# EAGLE board KoncovaCast_multi (EAGLE 6.4)
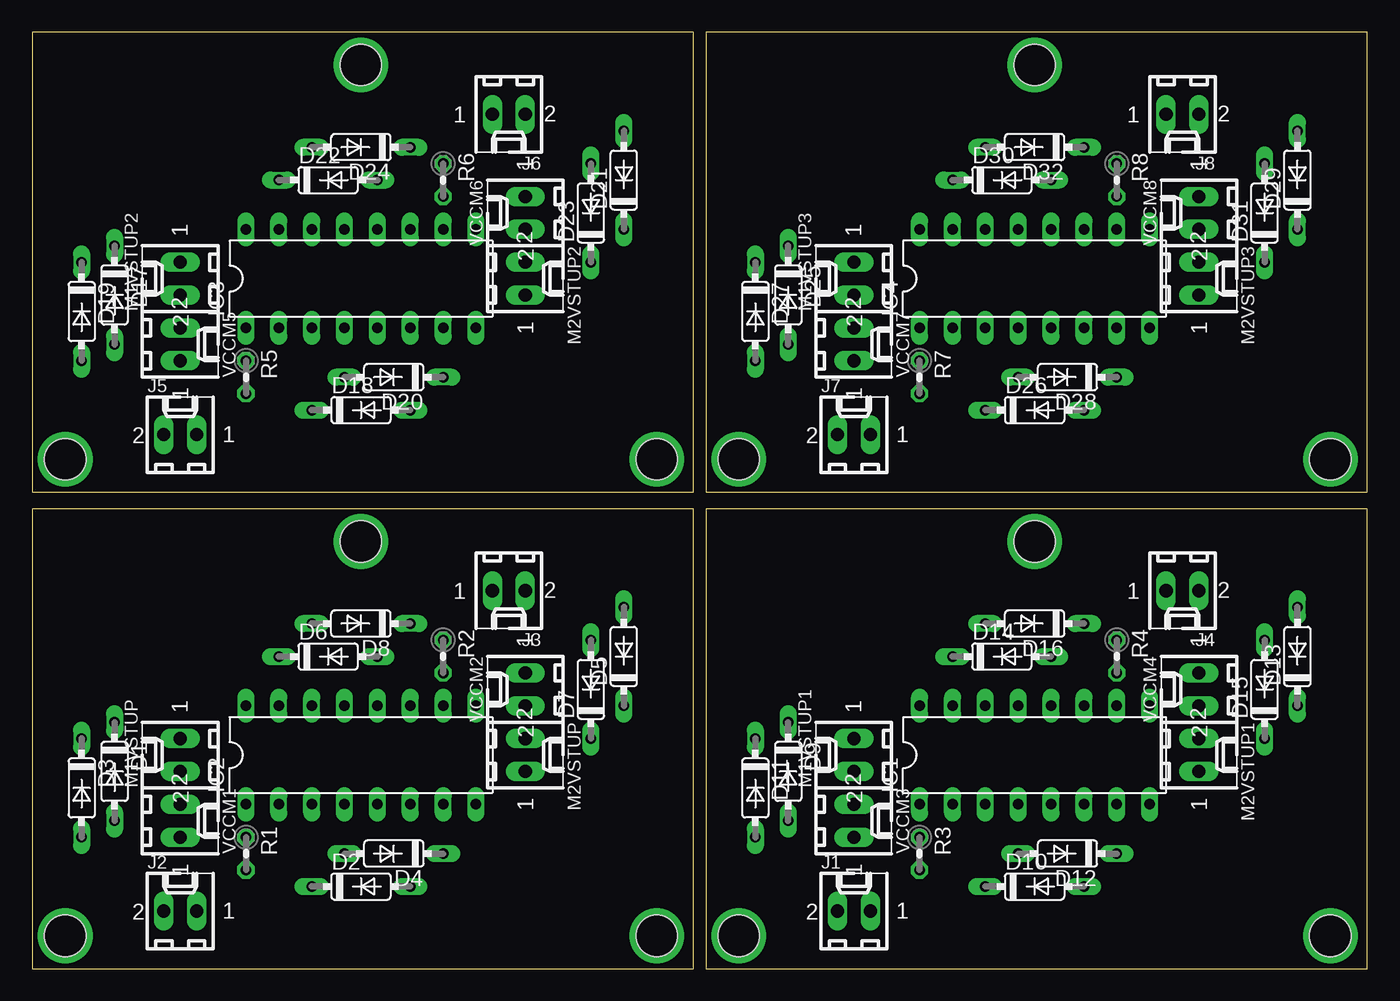
[diagram p0: board, top side]
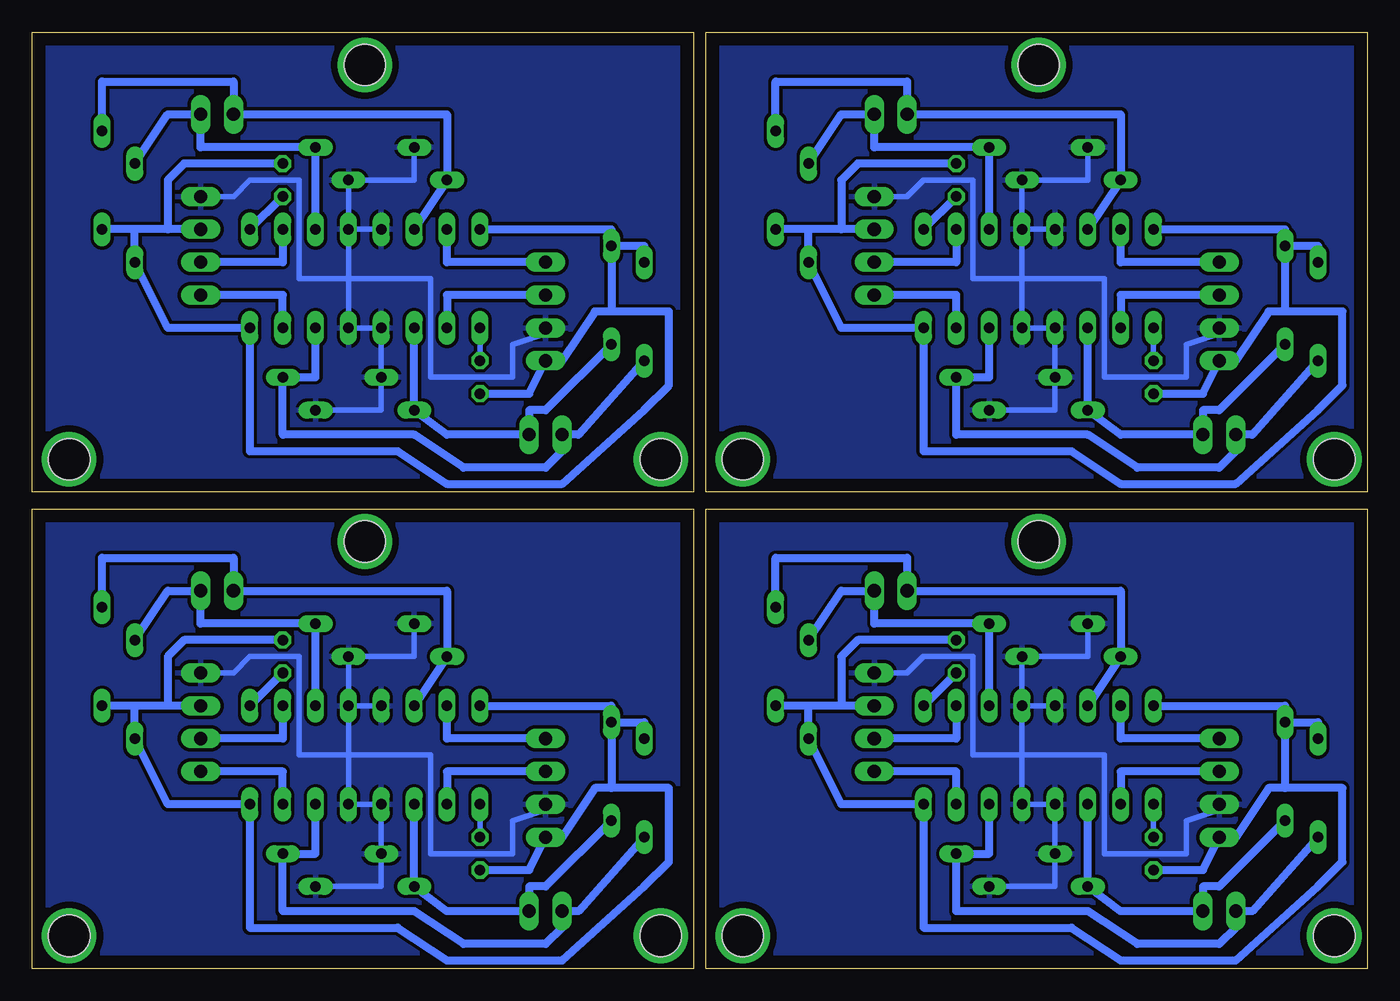
[diagram p1: board, bottom side, seen from below]

Size 103.17 x 72.38 mm. Coordinates in mm from the lower left corner, seen from the top.
Outline: 0,0 51.1,0 51.1,35.55 0,35.55 0,0
Outline: 52.07,0 103.17,0 103.17,35.55 52.07,35.55 52.07,0
Outline: 0,36.83 51.1,36.83 51.1,72.38 0,72.38 0,36.83
Outline: 52.07,36.83 103.17,36.83 103.17,72.38 52.07,72.38 52.07,36.83
Copper layers (1*16): Top 0.035mm / dielectric 1.5mm / Bottom 0.035mm
Design rules "default": minimum track width 10mil, minimum drill 24mil, track to track 8mil, track to pad 8mil, pad to pad 8mil, via to via 8mil, smd to smd 8mil, copper to edge 40mil, drill to drill 8mil, minimum pad ring 10mil, minimum via ring 8mil, stop-mask expansion 4mil, vias tented up to drill 0mil, thermal gap 10mil
Holes 3.2 mm at 2.54,2.54 48.26,2.54 25.4,33.02 54.61,2.54 100.33,2.54 77.47,33.02 2.54,39.37 48.26,39.37 25.4,69.85 54.61,39.37 100.33,39.37 77.47,69.85

## Footprints (pad centres in the part's own frame; a part is rotated, then mirrored left to right if it is on the bottom)
DO35-7 = drill 0.813 long: A 3.81,0; C -3.81,0
DIL16 = drill 0.813 long: 1 -8.89,-3.81; 2 -6.35,-3.81; 3 -3.81,-3.81; 4 -1.27,-3.81; 5 1.27,-3.81; 6 3.81,-3.81; 7 6.35,-3.81; 8 8.89,-3.81; 9 8.89,3.81; 10 6.35,3.81; 11 3.81,3.81; 12 1.27,3.81; 13 -1.27,3.81; 14 -3.81,3.81; 15 -6.35,3.81; 16 -8.89,3.81
6410-02 = drill 1.016 long: 1 1.27,0; 2 -1.27,0
0204V = drill 0.813 octagon: 1 -1.27,0; 2 1.27,0

## Placement (x,y rotation side)
D1  1N4148DO35-7  [DO35-7]  6.35,15.24 270 top
D2  1N4148DO35-7  [DO35-7]  25.4,6.35 0 top
D3  1N4148DO35-7  [DO35-7]  3.81,13.97 270 top
D4  1N4148DO35-7  [DO35-7]  27.94,8.89 180 top
D5  1N4148DO35-7  [DO35-7]  45.72,24.13 90 top
D6  1N4148DO35-7  [DO35-7]  22.86,24.13 0 top
D7  1N4148DO35-7  [DO35-7]  43.18,21.59 90 top
D8  1N4148DO35-7  [DO35-7]  25.4,26.67 180 top
D9  1N4148DO35-7  [DO35-7]  58.42,15.24 270 top
D10  1N4148DO35-7  [DO35-7]  77.47,6.35 0 top
D11  1N4148DO35-7  [DO35-7]  55.88,13.97 270 top
D12  1N4148DO35-7  [DO35-7]  80.01,8.89 180 top
D13  1N4148DO35-7  [DO35-7]  97.79,24.13 90 top
D14  1N4148DO35-7  [DO35-7]  74.93,24.13 0 top
D15  1N4148DO35-7  [DO35-7]  95.25,21.59 90 top
D16  1N4148DO35-7  [DO35-7]  77.47,26.67 180 top
D17  1N4148DO35-7  [DO35-7]  6.35,52.07 270 top
D18  1N4148DO35-7  [DO35-7]  25.4,43.18 0 top
D19  1N4148DO35-7  [DO35-7]  3.81,50.8 270 top
D20  1N4148DO35-7  [DO35-7]  27.94,45.72 180 top
D21  1N4148DO35-7  [DO35-7]  45.72,60.96 90 top
D22  1N4148DO35-7  [DO35-7]  22.86,60.96 0 top
D23  1N4148DO35-7  [DO35-7]  43.18,58.42 90 top
D24  1N4148DO35-7  [DO35-7]  25.4,63.5 180 top
D25  1N4148DO35-7  [DO35-7]  58.42,52.07 270 top
D26  1N4148DO35-7  [DO35-7]  77.47,43.18 0 top
D27  1N4148DO35-7  [DO35-7]  55.88,50.8 270 top
D28  1N4148DO35-7  [DO35-7]  80.01,45.72 180 top
D29  1N4148DO35-7  [DO35-7]  97.79,60.96 90 top
D30  1N4148DO35-7  [DO35-7]  74.93,60.96 0 top
D31  1N4148DO35-7  [DO35-7]  95.25,58.42 90 top
D32  1N4148DO35-7  [DO35-7]  77.47,63.5 180 top
IC1  L293D  [DIL16]  77.47,16.51 0 top
IC2  L293D  [DIL16]  25.4,16.51 0 top
IC3  L293D  [DIL16]  25.4,53.34 0 top
IC4  L293D  [DIL16]  77.47,53.34 0 top
J1  22-27-2021-02  [6410-02]  63.5,4.45 0 top
J2  22-27-2021-02  [6410-02]  11.43,4.45 0 top
J3  22-27-2021-02  [6410-02]  36.83,29.21 180 top
J4  22-27-2021-02  [6410-02]  88.9,29.21 180 top
J5  22-27-2021-02  [6410-02]  11.43,41.27 0 top
J6  22-27-2021-02  [6410-02]  36.83,66.04 180 top
J7  22-27-2021-02  [6410-02]  63.5,41.27 0 top
J8  22-27-2021-02  [6410-02]  88.9,66.04 180 top
M1VSTUP  22-27-2021-02  [6410-02]  11.43,16.51 90 top
M1VSTUP1  22-27-2021-02  [6410-02]  63.5,16.51 90 top
M1VSTUP2  22-27-2021-02  [6410-02]  11.43,53.34 90 top
M1VSTUP3  22-27-2021-02  [6410-02]  63.5,53.34 90 top
M2VSTUP  22-27-2021-02  [6410-02]  38.1,16.51 270 top
M2VSTUP1  22-27-2021-02  [6410-02]  90.17,16.51 270 top
M2VSTUP2  22-27-2021-02  [6410-02]  38.1,53.34 270 top
M2VSTUP3  22-27-2021-02  [6410-02]  90.17,53.34 270 top
R1  10k  [0204V]  16.51,8.89 270 top
R2  10k  [0204V]  31.75,24.13 270 top
R3  10k  [0204V]  68.58,8.89 270 top
R4  10k  [0204V]  83.82,24.13 270 top
R5  10k  [0204V]  16.51,45.72 270 top
R6  10k  [0204V]  31.75,60.96 270 top
R7  10k  [0204V]  68.58,45.72 270 top
R8  10k  [0204V]  83.82,60.96 270 top
VCCM1  22-27-2021-02  [6410-02]  11.43,11.43 270 top
VCCM2  22-27-2021-02  [6410-02]  38.1,21.59 90 top
VCCM3  22-27-2021-02  [6410-02]  63.5,11.43 270 top
VCCM4  22-27-2021-02  [6410-02]  90.17,21.59 90 top
VCCM5  22-27-2021-02  [6410-02]  11.43,48.26 270 top
VCCM6  22-27-2021-02  [6410-02]  38.1,58.42 90 top
VCCM7  22-27-2021-02  [6410-02]  63.5,48.26 270 top
VCCM8  22-27-2021-02  [6410-02]  90.17,58.42 90 top

## Library data of the parts
D1-D32 = diode
IC1-IC4 = st-microelectronics; MPN: L293D; OC_FARNELL: 9589619; OC_NEWARK: 56P8249
J1-J8 M1VSTUP M1VSTUP1-M1VSTUP3 M2VSTUP M2VSTUP1-M2VSTUP3 VCCM1-VCCM8 = con-molex; OC_FARNELL: unknown; OC_NEWARK: unknown
R1-R8 = resistor

## Nets
1A: IC2.2 M1VSTUP.2
1A1: IC1.2 M1VSTUP1.2
1A2: IC3.2 M1VSTUP2.2
1A3: IC4.2 M1VSTUP3.2
2A: IC2.7 M2VSTUP.1
2A1: IC1.7 M2VSTUP1.1
2A2: IC3.7 M2VSTUP2.1
2A3: IC4.7 M2VSTUP3.1
3A: IC2.10 M2VSTUP.2
3A1: IC1.10 M2VSTUP1.2
3A2: IC3.10 M2VSTUP2.2
3A3: IC4.10 M2VSTUP3.2
4A: IC2.15 M1VSTUP.1
4A1: IC1.15 M1VSTUP1.1
4A2: IC3.15 M1VSTUP2.1
4A3: IC4.15 M1VSTUP3.1
GND: D2.A D4.A D6.A D8.A IC2.4 IC2.5 IC2.12 IC2.13 VCCM1.2 VCCM2.1
GND1: D10.A D12.A D14.A D16.A IC1.4 IC1.5 IC1.12 IC1.13 VCCM3.2 VCCM4.1
GND2: D18.A D20.A D22.A D24.A IC3.4 IC3.5 IC3.12 IC3.13 VCCM5.2 VCCM6.1
GND3: D26.A D28.A D30.A D32.A IC4.4 IC4.5 IC4.12 IC4.13 VCCM7.2 VCCM8.1
M1: D9.A D10.C IC1.3 J1.1
M2: D11.A D12.C IC1.6 J1.2
M3: D15.A D16.C IC1.11 J4.2
M4: D13.A D14.C IC1.14 J4.1
M5: D17.A D18.C IC3.3 J5.1
M6: D19.A D20.C IC3.6 J5.2
M7: D23.A D24.C IC3.11 J6.2
M8: D21.A D22.C IC3.14 J6.1
M9: D25.A D26.C IC4.3 J7.1
M10: D27.A D28.C IC4.6 J7.2
M11: D1.A D2.C IC2.3 J2.1
M12: D3.A D4.C IC2.6 J2.2
M13: D31.A D32.C IC4.11 J8.2
M14: D29.A D30.C IC4.14 J8.1
M21: D5.A D6.C IC2.14 J3.1
M22: D7.A D8.C IC2.11 J3.2
N$1: IC2.1 R1.1
N$2: IC2.9 R2.2
N$6: IC1.1 R3.1
N$7: IC1.9 R4.2
N$11: IC3.1 R5.1
N$12: IC3.9 R6.2
N$16: IC4.1 R7.1
N$17: IC4.9 R8.2
VCC_M: D1.C D3.C D5.C D7.C IC2.8 IC2.16 R1.2 R2.1 VCCM1.1 VCCM2.2
VCC_M1: D9.C D11.C D13.C D15.C IC1.8 IC1.16 R3.2 R4.1 VCCM3.1 VCCM4.2
VCC_M2: D17.C D19.C D21.C D23.C IC3.8 IC3.16 R5.2 R6.1 VCCM5.1 VCCM6.2
VCC_M3: D25.C D27.C D29.C D31.C IC4.8 IC4.16 R7.2 R8.1 VCCM7.1 VCCM8.2

## Tracks (layer width: path | path; a pad name or v marks a point on that pad's centre or on a via)
1A
  Bottom 0.61: M1VSTUP.2 19.05,15.24 IC2.2
1A1
  Bottom 0.61: M1VSTUP1.2 71.12,15.24 IC1.2
1A2
  Bottom 0.61: M1VSTUP2.2 19.05,52.07 IC3.2
1A3
  Bottom 0.61: M1VSTUP3.2 71.12,52.07 IC4.2
2A
  Bottom 0.61: IC2.7 31.75,15.24 M2VSTUP.1
2A1
  Bottom 0.61: IC1.7 83.82,15.24 M2VSTUP1.1
2A2
  Bottom 0.61: IC3.7 31.75,52.07 M2VSTUP2.1
2A3
  Bottom 0.61: IC4.7 83.82,52.07 M2VSTUP3.1
3A
  Bottom 0.61: IC2.10 31.75,17.78 M2VSTUP.2
3A1
  Bottom 0.61: IC1.10 83.82,17.78 M2VSTUP1.2
3A2
  Bottom 0.61: IC3.10 31.75,54.61 M2VSTUP2.2
3A3
  Bottom 0.61: IC4.10 83.82,54.61 M2VSTUP3.2
4A
  Bottom 0.61: M1VSTUP.1 19.05,17.78 IC2.15
4A1
  Bottom 0.61: M1VSTUP1.1 71.12,17.78 IC1.15
4A2
  Bottom 0.61: M1VSTUP2.1 19.05,54.61 IC3.15
4A3
  Bottom 0.61: M1VSTUP3.1 71.12,54.61 IC4.15
GND
  Bottom 0.406: D2.A 24.13,6.35 D4.A IC2.4 IC2.5 26.67,16.51 | IC2.13 IC2.12 | 26.67,16.51 IC2.12 | IC2.12 D6.A 21.59,24.13 D8.A | VCCM2.1 35.56,22.86 34.29,24.13 30.48,24.13 30.48,16.51 26.67,16.51 | VCCM1.2 10.16,12.7 13.97,11.43 13.97,8.89 20.32,8.89 20.32,16.51 26.67,16.51
  pour Bottom (isolate 0.254): 0,35.56 50.8,35.56 50.8,0 0,0
GND1
  Bottom 0.406: D10.A 76.2,6.35 D12.A IC1.4 IC1.5 78.74,16.51 | IC1.13 IC1.12 | 78.74,16.51 IC1.12 | IC1.12 D14.A 73.66,24.13 D16.A | VCCM4.1 87.63,22.86 86.36,24.13 82.55,24.13 82.55,16.51 78.74,16.51 | VCCM3.2 62.23,12.7 66.04,11.43 66.04,8.89 72.39,8.89 72.39,16.51 78.74,16.51
  pour Bottom (isolate 0.254): 52.07,35.56 102.87,35.56 102.87,0 52.07,0
GND2
  Bottom 0.406: D18.A 24.13,43.18 D20.A IC3.4 IC3.5 26.67,53.34 | IC3.13 IC3.12 | 26.67,53.34 IC3.12 | IC3.12 D22.A 21.59,60.96 D24.A | VCCM6.1 35.56,59.69 34.29,60.96 30.48,60.96 30.48,53.34 26.67,53.34 | VCCM5.2 10.16,49.53 13.97,48.26 13.97,45.72 20.32,45.72 20.32,53.34 26.67,53.34
  pour Bottom (isolate 0.254): 0,72.39 50.8,72.39 50.8,36.83 0,36.83
GND3
  Bottom 0.406: D26.A 76.2,43.18 D28.A IC4.4 IC4.5 78.74,53.34 | IC4.13 IC4.12 | 78.74,53.34 IC4.12 | IC4.12 D30.A 73.66,60.96 D32.A | VCCM8.1 87.63,59.69 86.36,60.96 82.55,60.96 82.55,53.34 78.74,53.34 | VCCM7.2 62.23,49.53 66.04,48.26 66.04,45.72 72.39,45.72 72.39,53.34 78.74,53.34
  pour Bottom (isolate 0.254): 52.07,72.39 102.87,72.39 102.87,36.83 52.07,36.83
M1
  Bottom 0.61: D9.A 63.5,6.35 64.77,6.35 J1.1 71.12,4.45 D10.C IC1.3
M2
  Bottom 0.406: J1.2 62.23,3.17
  Bottom 0.61: IC1.6 81.28,8.89 D12.C 83.82,4.45 73.66,4.45 69.85,1.91 63.5,1.91 62.23,3.17 | D11.A 60.96,4.45 J1.2
M3
  Bottom 0.61: D15.A 92.71,29.21 J4.2 90.17,26.67 D16.C IC1.11
M4
  Bottom 0.61: IC1.14 D14.C 71.12,29.21 J4.1 87.63,31.75 97.79,31.75 D13.A
M5
  Bottom 0.61: D17.A 11.43,43.18 12.7,43.18 J5.1 19.05,41.27 D18.C IC3.3
M6
  Bottom 0.406: J5.2 10.16,40.01
  Bottom 0.61: IC3.6 29.21,45.72 D20.C 31.75,41.27 21.59,41.27 17.78,38.73 11.43,38.73 10.16,40.01 | D19.A 8.89,41.27 J5.2
M7
  Bottom 0.61: D23.A 40.64,66.04 J6.2 38.1,63.5 D24.C IC3.11
M8
  Bottom 0.61: IC3.14 D22.C 19.05,66.04 J6.1 35.56,68.58 45.72,68.58 D21.A
M9
  Bottom 0.61: D25.A 63.5,43.18 64.77,43.18 J7.1 71.12,41.27 D26.C IC4.3
M10
  Bottom 0.406: J7.2 62.23,40.01
  Bottom 0.61: IC4.6 81.28,45.72 D28.C 83.82,41.27 73.66,41.27 69.85,38.73 63.5,38.73 62.23,40.01 | D27.A 60.96,41.27 J7.2
M11
  Bottom 0.61: D1.A 11.43,6.35 12.7,6.35 J2.1 19.05,4.45 D2.C IC2.3
M12
  Bottom 0.406: J2.2 10.16,3.17
  Bottom 0.61: IC2.6 29.21,8.89 D4.C 31.75,4.45 21.59,4.45 17.78,1.91 11.43,1.91 10.16,3.17 | D3.A 8.89,4.45 J2.2
M13
  Bottom 0.61: D31.A 92.71,66.04 J8.2 90.17,63.5 D32.C IC4.11
M14
  Bottom 0.61: IC4.14 D30.C 71.12,66.04 J8.1 87.63,68.58 97.79,68.58 D29.A
M21
  Bottom 0.61: IC2.14 D6.C 19.05,29.21 J3.1 35.56,31.75 45.72,31.75 D5.A
M22
  Bottom 0.61: D7.A 40.64,29.21 J3.2 38.1,26.67 D8.C IC2.11
N$1
  Bottom 0.406: IC2.1 R1.1
N$2
  Bottom 0.61: IC2.9 R2.2
N$3  (via drill 3.2)
  other vias: 25.4,33.02
N$4  (via drill 3.2)
  other vias: 48.26,2.54
N$5  (via drill 3.2)
  other vias: 2.54,2.54
N$6
  Bottom 0.406: IC1.1 R3.1
N$7
  Bottom 0.61: IC1.9 R4.2
N$8  (via drill 3.2)
  other vias: 77.47,33.02
N$9  (via drill 3.2)
  other vias: 100.33,2.54
N$10  (via drill 3.2)
  other vias: 54.61,2.54
N$11
  Bottom 0.406: IC3.1 R5.1
N$12
  Bottom 0.61: IC3.9 R6.2
N$13  (via drill 3.2)
  other vias: 25.4,69.85
N$14  (via drill 3.2)
  other vias: 48.26,39.37
N$15  (via drill 3.2)
  other vias: 2.54,39.37
N$16
  Bottom 0.406: IC4.1 R7.1
N$17
  Bottom 0.61: IC4.9 R8.2
N$18  (via drill 3.2)
  other vias: 77.47,69.85
N$19  (via drill 3.2)
  other vias: 100.33,39.37
N$20  (via drill 3.2)
  other vias: 54.61,39.37
VCC_M
  Bottom 0.61: VCCM2.2 40.64,20.32 | 40.64,20.32 43.18,20.32 | 43.18,20.32 D5.C | 43.18,20.32 D7.C 40.64,12.7 IC2.8 34.29,3.17 22.86,3.17 19.05,0.64 10.16,0.64 3.81,6.35 1.91,8.26 1.91,13.97 6.35,13.97 | R2.1 39.37,25.4 40.64,24.13 40.64,20.32 | R1.2 12.7,7.62 VCCM1.1 10.16,10.16 7.62,13.97 6.35,13.97 | D1.C 6.35,13.97 | D3.C 3.81,19.05 D1.C | IC2.16 6.35,20.32 D1.C
VCC_M1
  Bottom 0.61: VCCM4.2 92.71,20.32 | 92.71,20.32 95.25,20.32 | 95.25,20.32 D13.C | 95.25,20.32 D15.C 92.71,12.7 IC1.8 86.36,3.17 74.93,3.17 71.12,0.64 62.23,0.64 55.88,6.35 53.98,8.26 53.98,13.97 58.42,13.97 | R4.1 91.44,25.4 92.71,24.13 92.71,20.32 | R3.2 64.77,7.62 VCCM3.1 62.23,10.16 59.69,13.97 58.42,13.97 | D9.C 58.42,13.97 | D11.C 55.88,19.05 D9.C | IC1.16 58.42,20.32 D9.C
VCC_M2
  Bottom 0.61: VCCM6.2 40.64,57.15 | 40.64,57.15 43.18,57.15 | 43.18,57.15 D21.C | 43.18,57.15 D23.C 40.64,49.53 IC3.8 34.29,40.01 22.86,40.01 19.05,37.47 10.16,37.47 3.81,43.18 1.91,45.09 1.91,50.8 6.35,50.8 | R6.1 39.37,62.23 40.64,60.96 40.64,57.15 | R5.2 12.7,44.45 VCCM5.1 10.16,46.99 7.62,50.8 6.35,50.8 | D17.C 6.35,50.8 | D19.C 3.81,55.88 D17.C | IC3.16 6.35,57.15 D17.C
VCC_M3
  Bottom 0.61: VCCM8.2 92.71,57.15 | 92.71,57.15 95.25,57.15 | 95.25,57.15 D29.C | 95.25,57.15 D31.C 92.71,49.53 IC4.8 86.36,40.01 74.93,40.01 71.12,37.47 62.23,37.47 55.88,43.18 53.98,45.09 53.98,50.8 58.42,50.8 | R8.1 91.44,62.23 92.71,60.96 92.71,57.15 | R7.2 64.77,44.45 VCCM7.1 62.23,46.99 59.69,50.8 58.42,50.8 | D25.C 58.42,50.8 | D27.C 55.88,55.88 D25.C | IC4.16 58.42,57.15 D25.C